# Altium PCB zb_relay.PcbDoc
Units mil, origin at the board's own origin, x right, y up, seen from the top; angles counter-clockwise.
Board outline 3550 x 2400 mil, 2 copper layers (Top Layer, Bottom Layer); 57 components, 47 nets, 174 pads, 6 vias.
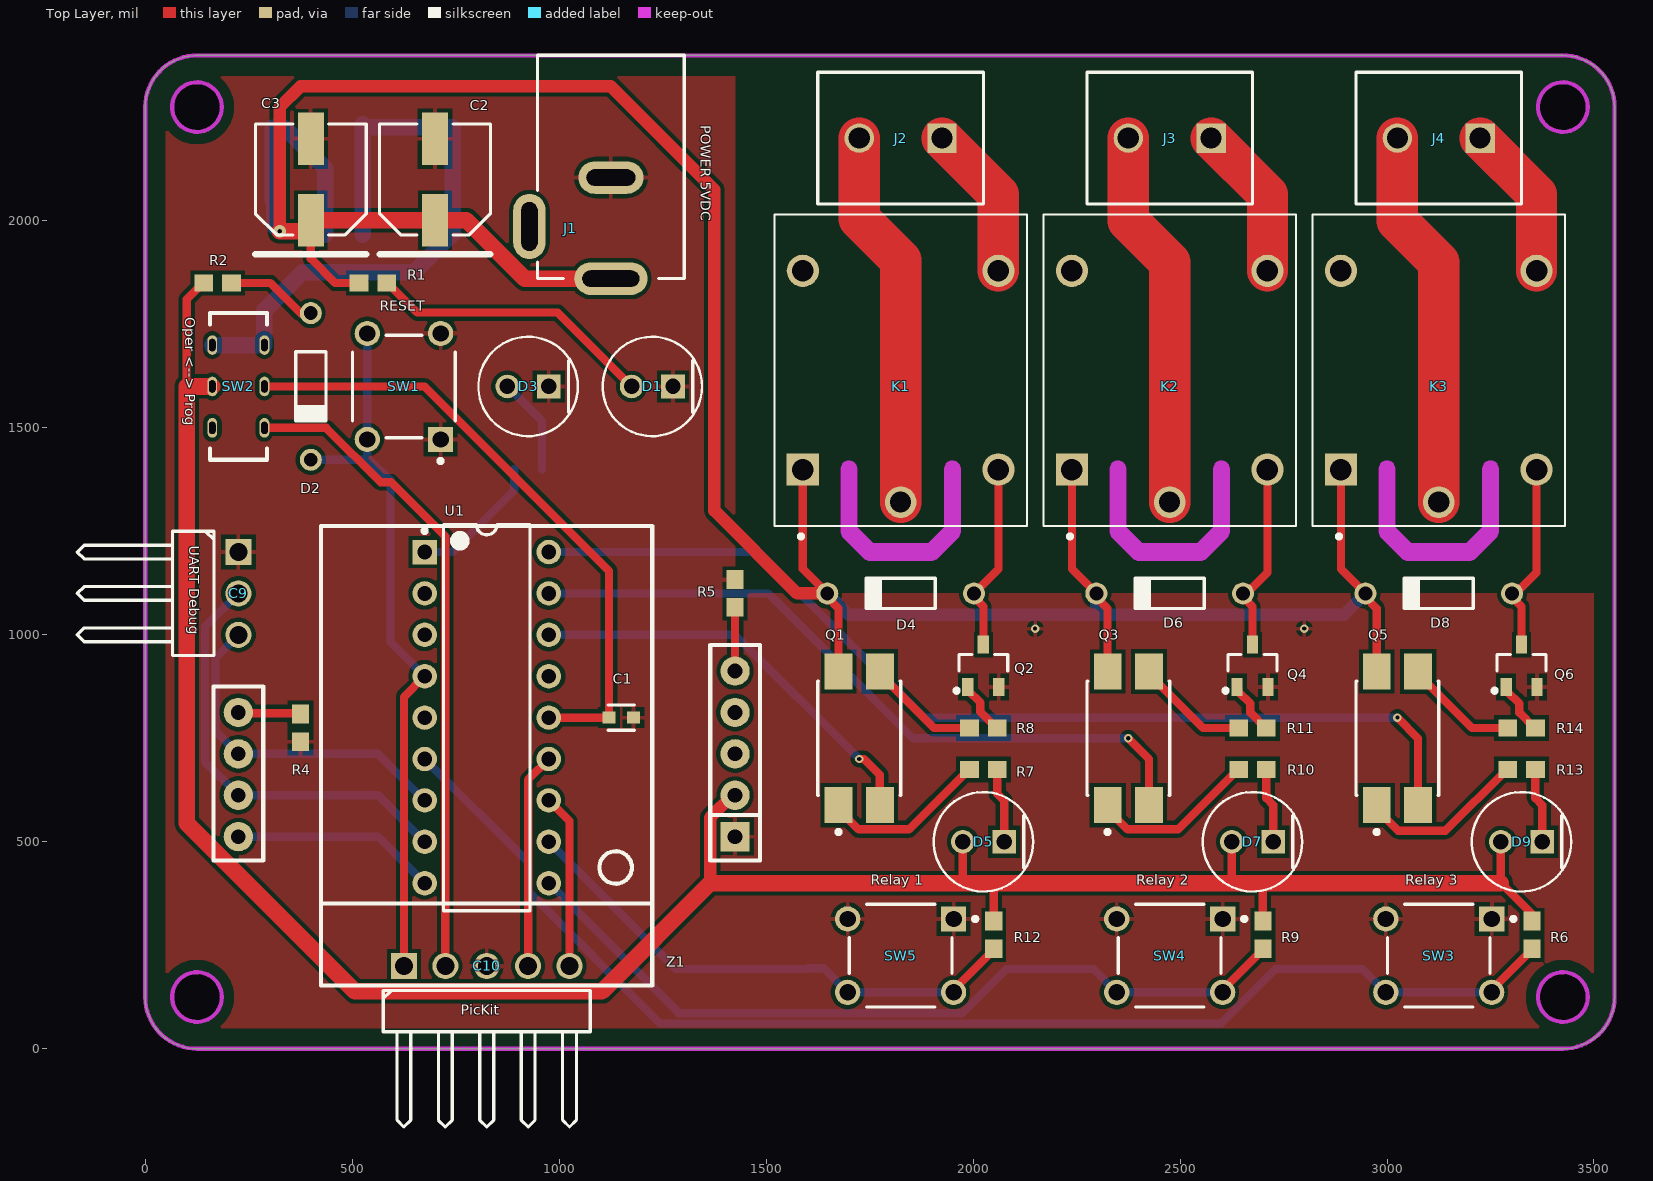
[diagram p0: Top Layer view]
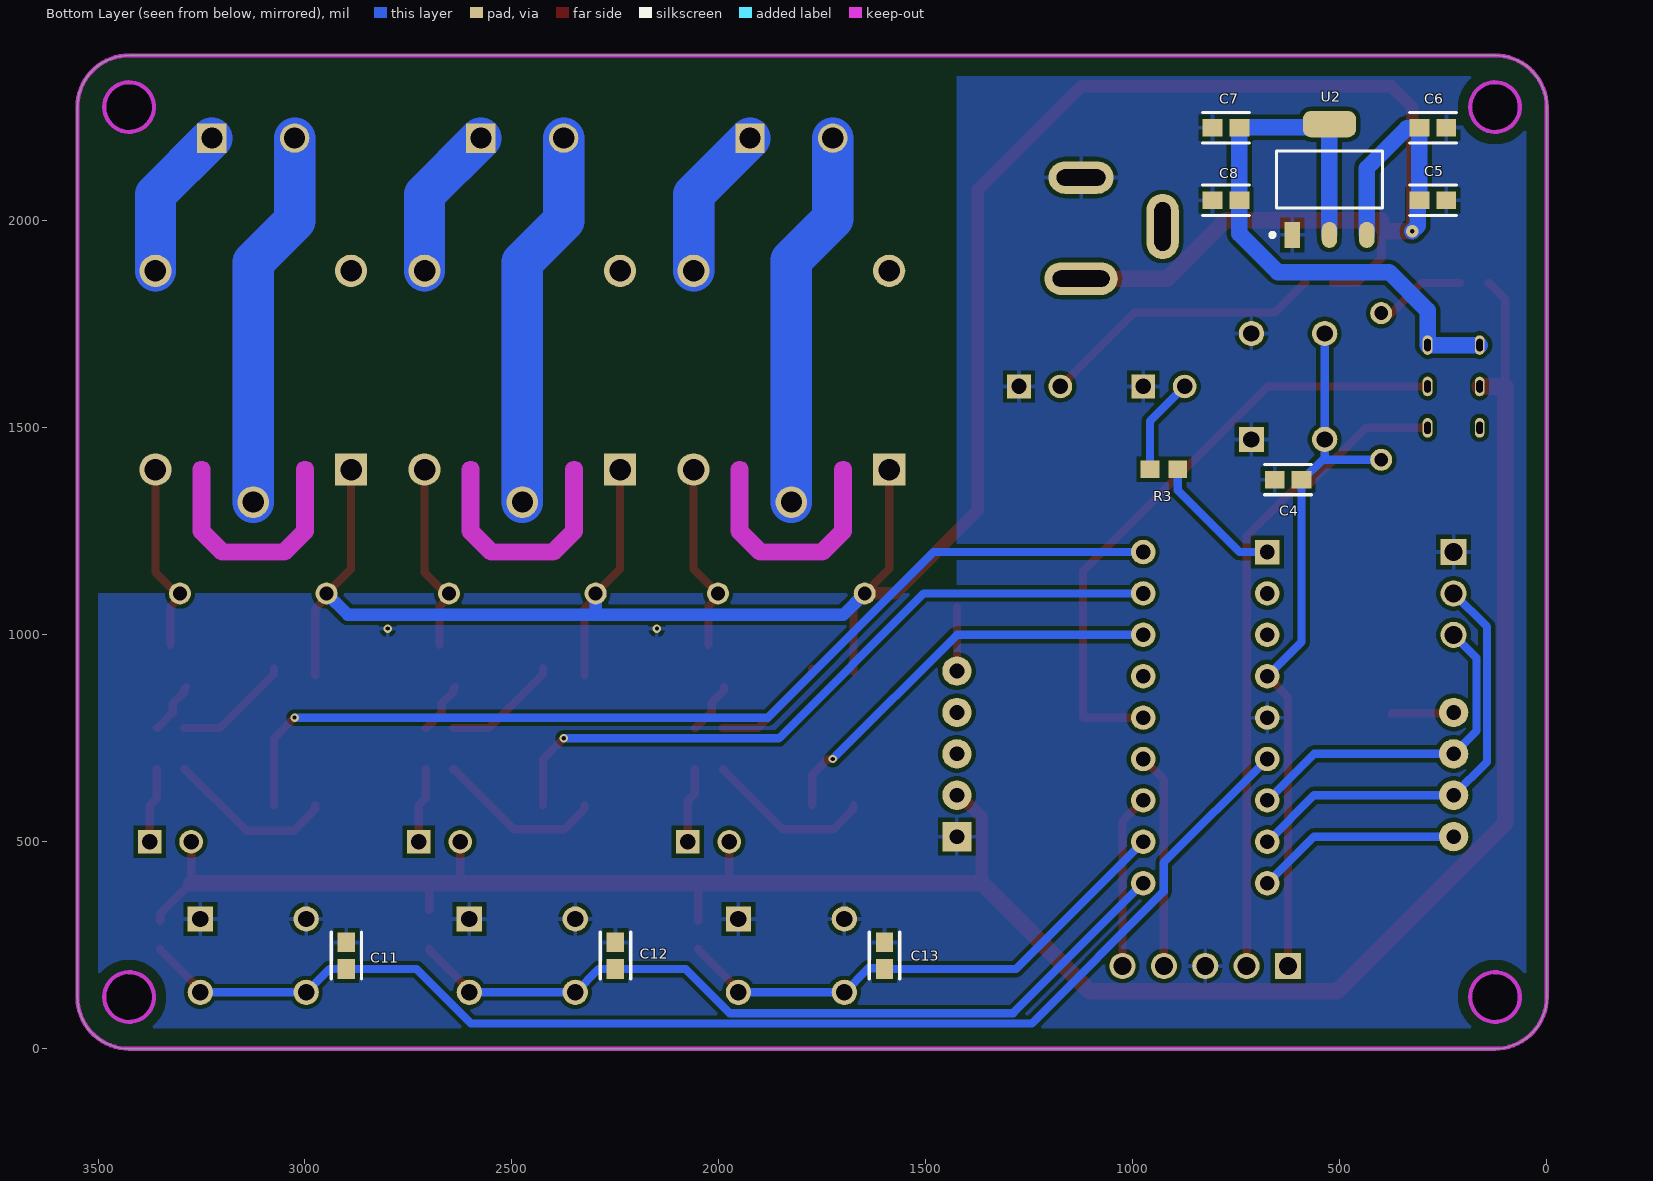
[diagram p1: Bottom Layer view, seen from below]
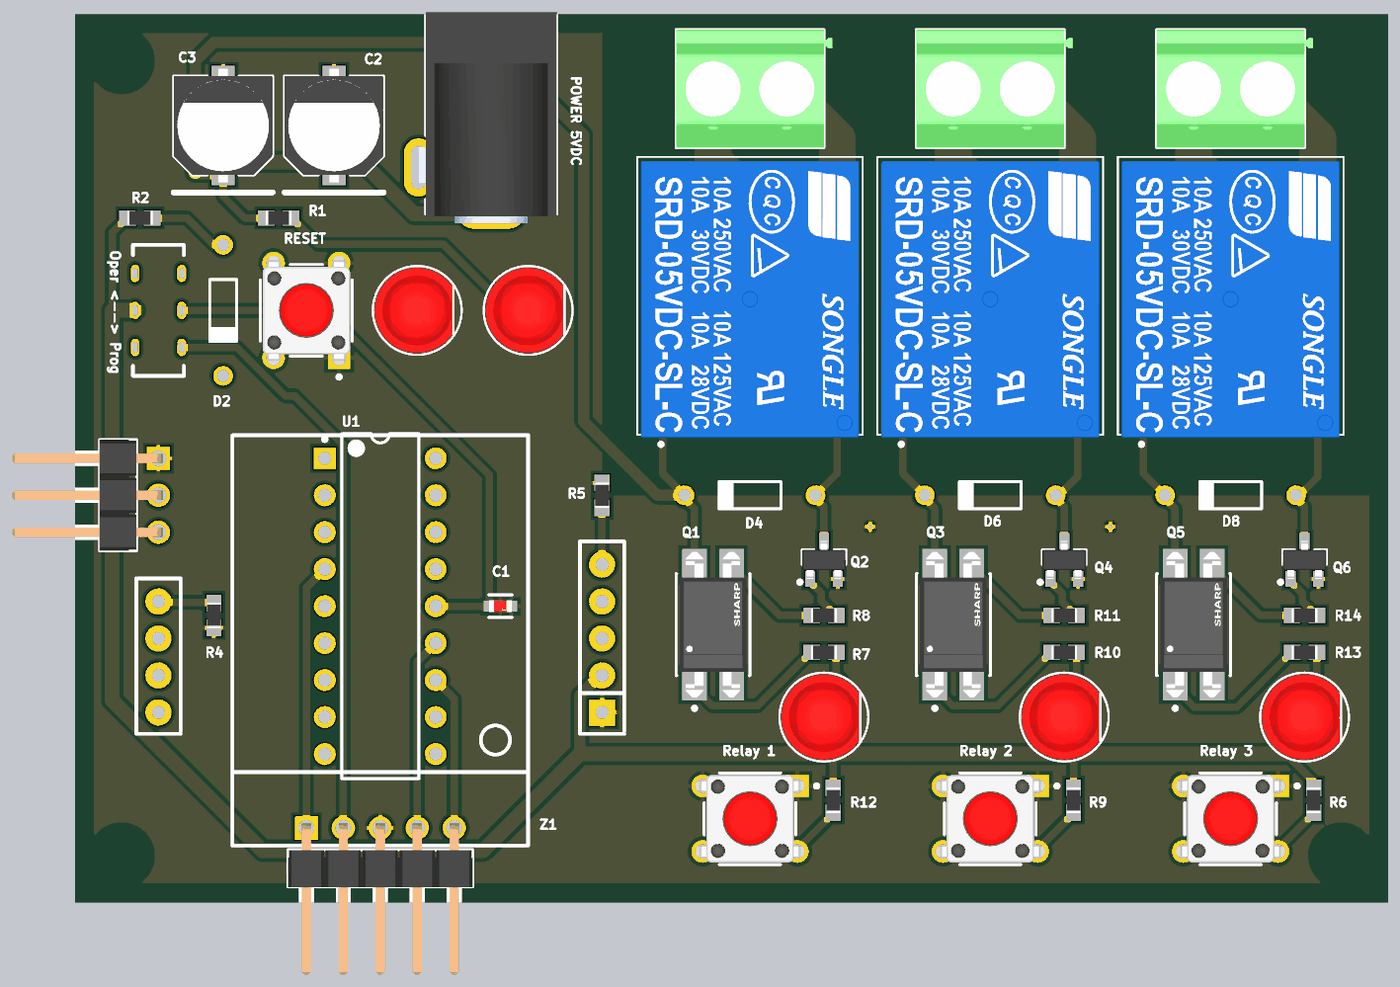
[diagram p2: 3D render of the assembled board from above, using the file's embedded part models]
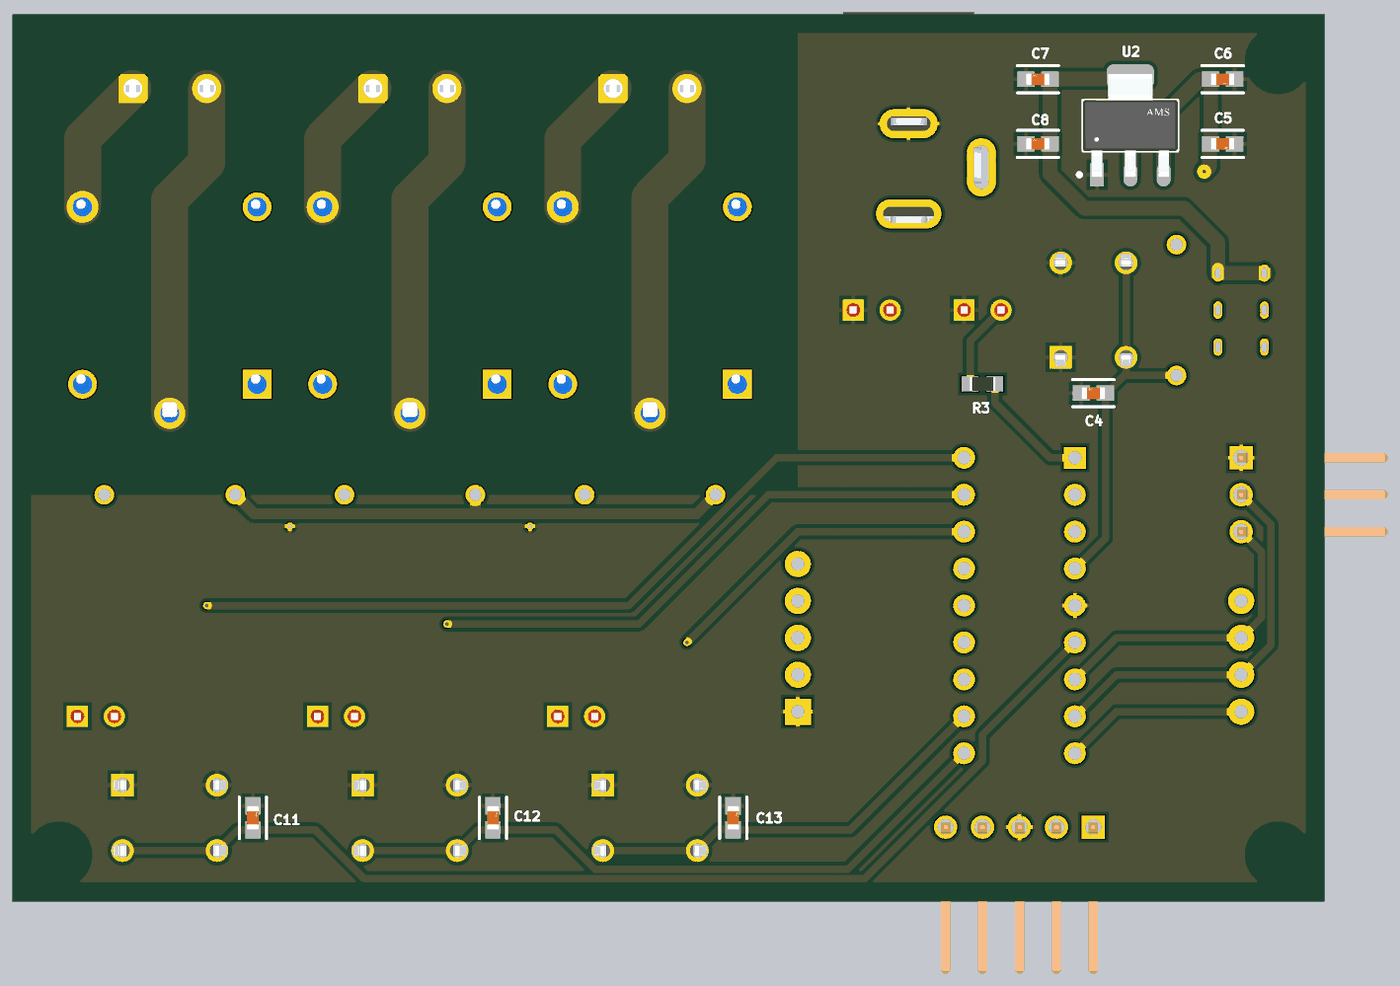
[diagram p3: 3D render of the assembled board from below, using the file's embedded part models]

## Layer stack, top to bottom
Top Solder: solder mask 0.4, Solder Resist, Dk 3.5
Top Layer: signal copper 1.4
Dielectric 1: dielectric 12.6, FR-4, Dk 4.8
Bottom Layer: signal copper 1.4
Bottom Solder: solder mask 0.4, Solder Resist, Dk 3.5

## Board outline
125,0 cw(c125,125) 0,125 0,2275 cw(c125,2275) 125,2400 3425,2400 cw(c3425,2275) 3550,2275 3550,125 cw(c3425,125) 3425,0
cut-out: 3035.81,1185.88 ccw(c3050,1200) 3050,1179.99 3200,1179.99 ccw(c3200,1200) 3214.19,1185.88 3214.15,1185.85 3264.15,1235.85 3264.12,1235.81 ccw(c3250,1250) 3270.02,1250 3270.02,1400 ccw(c3250,1400) 3229.98,1400 3229.98,1258.29 3191.71,1220.01 3058.29,1220.01 3020.02,1258.29 3020.02,1400 ccw(c3000,1400) 2979.98,1400 2979.98,1250 ccw(c3000,1250) 2985.88,1235.81 2985.85,1235.85
cut-out: 2385.81,1185.88 ccw(c2400,1200) 2400,1179.99 2550,1179.99 ccw(c2550,1200) 2564.19,1185.88 2564.15,1185.85 2614.15,1235.85 2614.12,1235.81 ccw(c2600,1250) 2620.01,1250 2620.01,1400 ccw(c2600,1400) 2579.99,1400 2579.99,1258.29 2541.71,1220.01 2408.29,1220.01 2370.01,1258.29 2370.01,1400 ccw(c2350,1400) 2329.99,1400 2329.99,1250 ccw(c2350,1250) 2335.88,1235.81 2335.85,1235.85
cut-out: 1735.81,1185.88 ccw(c1750,1200) 1750,1179.99 1900,1179.99 ccw(c1900,1200) 1914.19,1185.88 1914.15,1185.85 1964.15,1235.85 1964.12,1235.81 ccw(c1950,1250) 1970.01,1250 1970.01,1400 ccw(c1950,1400) 1929.99,1400 1929.99,1258.29 1891.71,1220.01 1758.29,1220.01 1720.01,1258.29 1720.01,1400 ccw(c1700,1400) 1679.99,1400 1679.99,1250 ccw(c1700,1250) 1685.88,1235.81 1685.85,1235.85
cut-out: 125,65 cw(c125,125) 65,125 cw(c125,125) 125,185 cw(c125,125) 185,125 cw(c125,125)
cut-out: 3365,2275 ccw(c3425,2275) 3425,2215 ccw(c3425,2275) 3485,2275 ccw(c3425,2275) 3425,2335 ccw(c3425,2275)
cut-out: 3365,125 ccw(c3425,125) 3425,65 ccw(c3425,125) 3485,125 ccw(c3425,125) 3425,185 ccw(c3425,125)
cut-out: 125,2215 cw(c125,2275) 65,2275 cw(c125,2275) 125,2335 cw(c125,2275) 185,2275 cw(c125,2275)

## Design rules (kind name [scope] priority, off if disabled: settings)
Clearance [All] p1: gap=5 ignorepadtopadclearanceinfootprint=TRUE except(10: Track-THPad Track-Poly SMDPad-Poly THPad-Poly Via-Poly; 30: Poly-Region)
ComponentClearance [All] p1: gap=0 collisioncheckmode=3 verticalgap=0 showdistances=FALSE
HoleSize [All] p1: absolutevalues=TRUE maxlimit=150 minlimit=1 maxpercent=80.000 minpercent=20.000
MinimumSolderMaskSliver [All] p1: minsoldermaskwidth=1
PolygonConnect [All] p1: connectstyle=Relief reliefconductorwidth=10 reliefentries=4 polygonreliefangle="90 Angle" airgapwidth=10
RoutingVias [All] p1: holewidth=10 width=20 viastyle="Through Hole" minholewidth=5 minwidth=10 maxholewidth=20 maxwidth=50
SilkToSilkClearance [All] p1: silktosilkclearance=5
SilkToSolderMaskClearance [IsPad] p1: minsilkscreentomaskgap=1 clearancetoexposedcopper=TRUE
SolderMaskExpansion [All] p1: expansion=4 istentingtop=FALSE
Width [All] p1: maxlimit=100 minlimit=10 preferedwidth=20
25 further rules are at their usual default settings.

## Classes and differential pairs
component class zb_16f628a: C1 C2 C3 C4 C5 C6 C7 C8 C9 C10 D1 D2 D3 J1 R1 R2 R3 R4 R5 SW1 SW2 U1 U2 Z1
component class relay_button: C11 C12 C13 D4 D5 D6 D7 D8 D9 J2 J3 J4 K1 K2 K3 Q1 Q2 Q3 Q4 Q5 Q6 R6 R7 R8 R9 R10 R11 R12 R13 R14 SW3 SW4 SW5

## Components (designator, comment, footprint, x,y, rotation, side; value= is the part's Value field where it differs from the comment)
C1 "0.1uF" FP-0603-L_1_6_0_15-W_0_81-MFG 1150,800 r0 top
C2 "100uF" PNSC-FK-V-D8_V 700,2100 r90 top
C3 "100uF" PNSC-FK-V-D8_V 400,2100 r90 top
C4 "10μF" FP-0603-L_1_6_0_15-W_0_81-IPC_A 625,1375 r0 bottom
C5 "100nF" FP-0603-L_1_6_0_15-W_0_81-IPC_A 275,2050 r180 bottom
C6 "10μF" FP-0603-L_1_6_0_15-W_0_81-IPC_A 275,2225 r180 bottom
C7 "10μF" FP-0603-L_1_6_0_15-W_0_81-IPC_A 775,2225 r0 bottom
C8 "100nF" FP-0603-L_1_6_0_15-W_0_81-IPC_A 775,2050 r0 bottom
C9 "UART Debug" JP3-D1C 125,950 r270 top
C10 "PicKit" JP5-D1C 1075,100 r0 top
C11 "10μF" FP-0603-L_1_6_0_15-W_0_81-IPC_A 2900,225 r90 bottom
C12 "10μF" FP-0603-L_1_6_0_15-W_0_81-IPC_A 2250,225 r90 bottom
C13 "10μF" FP-0603-L_1_6_0_15-W_0_81-IPC_A 1600,225 r90 bottom
D1 "Power" FP-HLMP-4700-MFG 1225,1600 r180 top
D2 "1N4148" NXP-SOD27-2_V 400,1600 r270 top
D3 "Indicator" FP-HLMP-4700-MFG 925,1600 r180 top
D4 "1N4148" NXP-SOD27-2_V 1825,1100 r180 top
D5 "Relay 1" FP-HLMP-4700-MFG 2025,500 r180 top
D6 "1N4148" NXP-SOD27-2_V 2475,1100 r180 top
D7 "Relay 2" FP-HLMP-4700-MFG 2675,500 r180 top
D8 "1N4148" NXP-SOD27-2_V 3125,1100 r180 top
D9 "Relay 3" FP-HLMP-4700-MFG 3325,500 r180 top
J1 "POWER 5VDC" KYCN-KLDX-0202-B_V 1125,2400 r270 top
J2 "Relay1" PHOE-1729128-2_V 1825,2200 r180 top
J3 "Relay2" PHOE-1729128-2_V 2475,2200 r180 top
J4 "Relay3" PHOE-1729128-2_V 3125,2200 r180 top
K1 "SRD-05VDC-SL-C" RELAY_SRD-05VDC-SL-C 1825,1600 r270 top
K2 "SRD-05VDC-SL-C" RELAY_SRD-05VDC-SL-C 2475,1600 r270 top
K3 "SRD-05VDC-SL-C" RELAY_SRD-05VDC-SL-C 3125,1600 r270 top
Q1 "PC817XNNIP0F" FP-PC817XNNIP0F-MFG 1725,750 r90 top
Q2 "2SC1815" SOT23_3 2025,925 r90 top
Q3 "PC817XNNIP0F" FP-PC817XNNIP0F-MFG 2375,750 r90 top
Q4 "2SC1815" SOT23_3 2675,925 r90 top
Q5 "PC817XNNIP0F" FP-PC817XNNIP0F-MFG 3025,750 r90 top
Q6 "2SC1815" SOT23_3 3325,925 r90 top
R1 "1K" RESC1609X55X30ML15T15 550,1850 r180 top
R2 "10K" RESC1609X55X30ML15T15 175,1850 r180 top
R3 "510" RESC1609X55X30ML15T15 925,1400 r180 bottom
R4 "10K" RESC1609X55X30ML15T15 375,775 r90 top
R5 "10K" RESC1609X55X30ML15T15 1425,1100 r270 top
R6 "10K" RESC1609X55X30ML15T15 3350,275 r90 top
R7 "1K" RESC1609X55X30ML15T15 2025,675 r180 top
R8 "1K" RESC1609X55X30ML15T15 2025,775 r0 top
R9 "10K" RESC1609X55X30ML15T15 2700,275 r90 top
R10 "1K" RESC1609X55X30ML15T15 2675,675 r180 top
R11 "1K" RESC1609X55X30ML15T15 2675,775 r0 top
R12 "10K" RESC1609X55X30ML15T15 2050,275 r90 top
R13 "1K" RESC1609X55X30ML15T15 3325,675 r180 top
R14 "1K" RESC1609X55X30ML15T15 3325,775 r0 top
SW1 "RESET" FP-EVQ-PAG05R-MFG 625,1600 r180 top
SW2 "MH-G6" MH-G6 225,1600 r270 top
SW3 "RESET" FP-EVQ-PAG05R-MFG 3125,225 r270 top
SW4 "RESET" FP-EVQ-PAG05R-MFG 2475,225 r270 top
SW5 "RESET" FP-EVQ-PAG05R-MFG 1825,225 r270 top
U1 "PIC16F628A-I/P" PDIP300-P18 825,800 r0 top
U2 "AMS1117-3.3" FP-AMS1117-IPC_A 525,2100 r90 bottom
Z1 "SZ1V5" "SZ1V5 PINOUT MODULE" 825,825 r180 top

## Footprints (in the part's own frame and the unit in brackets; to place one, negate y for a bottom-side part, rotate by r counter-clockwise, add the part's x,y. Pads: shape width x height; smd on the part's side, far side on the other; paste and mask are expansions set on the pad)
FP-0603-L_1_6_0_15-W_0_81-IPC_A [mil]
  rect 47.5x42.06 smd paste+0 mask+0: 1(-32.51,0) 2(32.51,0)
  silkscreen extent -56,-37 56,37, body extent -31,-16 31,16, height 35
FP-0603-L_1_6_0_15-W_0_81-MFG [mm]
  rect 0.8x0.75 smd paste+0 mask+0: 1(-0.75,0) 2(0.75,0)
  silkscreen extent -0.8,-0.77 0.8,0.77, body extent -1.25,-0.58 1.25,0.58, height 0.25
FP-AMS1117-IPC_A [mm]
  rect 1.604x0.952 smd paste+0 mask+0: 1(-3.395,2.29)
  rrect100% 1.604x0.952 smd paste+0 mask+0: 2(-3.395,0) 3(-3.395,-2.29)
  rrect59% 1.604x3.262 smd paste+0 mask+0: 4(3.395,0)
  silkscreen extent -3.52,-3.25 1.75,3.63, body extent -3.53,-3.25 3.53,3.25, height 1.8
FP-EVQ-PAG05R-MFG [mm]
  rect 1.55x1.55 hole 1 paste-1000 mask+0: A(-2.25,3.25)
  round 1.55 hole 1 paste-1000 mask+0: A'(-2.25,-3.25) B(2.25,3.25) B'(2.25,-3.25)
  silkscreen extent -3.15,-3.15 3.15,4.7, body extent -3.25,-4.13 3.25,4.13, height 0.25
FP-HLMP-4700-MFG [mm]
  rect 1.45x1.45 hole 0.95 paste-1000 mask+0: 1(-1.27,0)
  round 1.45 hole 0.95 paste-1000 mask+0: 2(1.27,0)
  silkscreen extent -3.05,-3.05 3.05,3.05, body extent -3.15,-3.15 3.15,3.15, height 0.25
FP-PC817XNNIP0F-MFG [mm]
  rect 2.2x1.7 smd paste+0 mask+0: 1(-4.1,1.27) 2(-4.1,-1.27) 3(4.1,-1.27) 4(4.1,1.27)
  silkscreen extent -5.87,-2.54 3.5,2.54, body extent -5.3,-2.64 5.3,2.64, height 0.25
JP3-D1C [mm] "3 pins, 1 row, right angled, gold plating"
  rect 1.6x1.6 hole 1.1: 1(-6.35,2.54)
  round 1.6 hole 1.1: 2(-3.81,2.54) 3(-1.27,2.54)
  silkscreen extent -7.62,-7.34 0,1.04, body extent -7.62,-7.52 0,2.84, height 2.55
JP5-D1C [mm] "5 pins, 1 row, right angled, gold plating"
  rect 1.6x1.6 hole 1.1: 1(-11.43,2.54)
  round 1.6 hole 1.1: 2(-8.89,2.54) 3(-6.35,2.54) 4(-3.81,2.54) 5(-1.27,2.54)
  silkscreen extent -12.7,-7.34 0,1.04, body extent -12.7,-7.52 0,2.84, height 2.55
KYCN-KLDX-0202-B_V [mm] "3 Conductor Jack, 9 x 14.5 mm Body"
  oval 2x4.5 hole 1 slot 3.5 at 90 deg: 1(13.7,0)
  oval 2x4 hole 1 slot 3 at 90 deg: 2(7.5,0)
  oval 4x2 hole 1 slot 3 at 0 deg: 3(10.5,-5)
  silkscreen extent 0,-4.5 13.7,4.5, body extent -0.15,-5 14.35,4.5, height 11
MH-G6 [mm]
  rrect100% 1.2x0.6 hole 0.4 slot 0.75 at 0 deg: 1(-2.54,-1.6) 2(0,-1.6) 3(2.54,-1.6) 4(-2.54,1.6) 5(0,1.6) 6(2.54,1.6)
  silkscreen extent -4.5,-1.75 4.5,1.75
NXP-SOD27-2_V [mm] "SOD27, 2-Leads, Dia 1.85mm, Body Length 4.25mm, Pin Spacing 9mm"
  round 1.35 hole 0.85: 1(-4.5,0) 2(4.5,0)
  silkscreen extent -2.12,-0.93 2.12,0.92, body extent -4.78,-0.92 4.78,0.92, height 1.84
PDIP300-P18 [mm] "DIP, 18-Pin, Row Spacing 7.62 mm, Pitch 2.54 mm"
  rect 1.5x1.5 hole 0.9: 1(-3.81,10.16)
  round 1.5 hole 0.9: 2(-3.81,7.62) 3(-3.81,5.08) 4(-3.81,2.54) 5(-3.81,0) 6(-3.81,-2.54) 7(-3.81,-5.08) 8(-3.81,-7.62) 9(-3.81,-10.16) 10(3.81,-10.16) 11(3.81,-7.62) 12(3.81,-5.08) 13(3.81,-2.54) 14(3.81,0) 15(3.81,2.54) 16(3.81,5.08) 17(3.81,7.62) 18(3.81,10.16)
  silkscreen extent -3.93,-11.85 2.65,11.85, body extent -3.6,-11.8 3.6,11.8, height 5.33
PHOE-1729128-2_V [mm] "Receptacle, 2-Leads, Body 8.1x10.16mm, Pitch 5.08mm"
  rect 1.8x1.8 hole 1.3: 1(-2.54,0)
  round 1.8 hole 1.3: 2(2.54,0)
  silkscreen extent -5.08,-4.05 5.08,4.05, body extent -5.65,-4.05 5.08,4.05, height 10.01
PNSC-FK-V-D8_V [mm] "CAPAE, 2-Leads, Body 6.80x6.80mm"
  rect 3.2x1.6 smd: 1(-2.5,0) 2(2.5,0)
  silkscreen extent -4.6,-3.4 3.4,3.4, body extent -3.9,-3.4 3.9,3.4, height 8
RELAY_SRD-05VDC-SL-C [mm]
  rect 1.98x1.98 hole 1.32: A1(5.1,-6)
  round 1.98 hole 1.32: A2(5.1,6) NC(-7.1,-6) NO(-7.1,6)
  round 1.935 hole 1.29: COM(7.1,0)
  silkscreen extent -10.55,-7.75 9.3,7.75, body extent -10.27,-7.5 8.73,7.5, height 16.15
RESC1609X55X30ML15T15 [mm] "Chip Resistor, 2-Leads, Body 1.75x0.95mm, IPC Low Density"
  rect 1.15x1.05 smd: 1(-0.85,0) 2(0.85,0)
  body extent -0.87,-0.48 0.87,0.48, height 0.55
SOT23_3 [mm] "SOT23, 3-Leads, Body 2,90x2,30mm, Pitch 0,95mm, IPC Medium Density"
  rect 1.1x0.7 smd: 1(-1.3,0.95) 2(-1.3,-0.95) 3(1.3,0)
  silkscreen extent -1.65,-1.5 0.7,1.78, body extent -1.3,-1.5 1.3,1.5, height 1.1
"SZ1V5 PINOUT MODULE" [mm]
  rect 1.8x1.8 hole 0.9: 1(-15.24,7.937)
  round 1.8 hole 0.9: 3(-15.24,5.397) 5(-15.24,2.857) 6(-15.24,0.317) 7(-15.24,-2.223) 13(15.24,7.938) 16(15.24,5.398) 17(15.24,2.858) 24(15.24,0.318)
  silkscreen extent -16.76,-11.11 16.76,17.08

## Part data
C1 C4 C6 C7 C11 C12 C13: library part CMP-1035-02592-4, "General Purpose Ceramic Capacitor, 0603, 100nF, 10%, X7R, 15%, 50V", Capacitance=100nF, Case Code (Imperial)=0603, Case Code (Metric)=1608, Dielectric=X7R, Dielectric Material=Ceramic, Max Operating Temperature=125°C, Min Operating Temperature=-55°C, Package Quantity=1, Tolerance=10%, Voltage=50V, Case/Package=0603, Contact Plating=Tin, Depth=0.81mm, Dissipation Factor=2.5%, Height=0.9mm, Lead Free="Lead Free", Length=1.6mm, Mount="Surface Mount", Number of Pins=2, Packaging="Tape and Reel", Radiation Hardening=No, REACH SVHC="No SVHC", Termination=SMD/SMT, Thickness=0.035inch, Voltage Rating=50V, Voltage Rating (DC)=50V, Width=0.81mm
C2 C3: library part CMP-2000-06206-1, "Aluminum Electrolytic Capacitor, 100 uF, +/- 20%, 25 V, 2-Pin SMD (Size Code D8), -55 to 105 degC, RoHS, Tape and Reel", Capacitance=100µF, Case Size/Dimension=Ø6.3x7.7mm, Lifetime@Temperature=2000Hrs@105°C, Manufacturer=Panasonic, Operating Temp Range=-55to+105°C, Operating Temp-Max=105°C, Package Description="2-Pin Electrolytic Aluminum Capacitor, Body 6.6 x 6.6 mm", Package Reference=FK-V-D8, Rated Voltage=25V, Ripple Current=280mA, Datasheet URL=http://industrial.panasonic.com/cdbs/www-data/pdf/RDE0000/ABA0000C1181.pdf, Datasheet Version=03/2016, Impedance=0.34O, Manufacturer URL=http://www.panasonic.com/, Mounting Technology=SurfaceMount, Package URL=http://industrial.panasonic.com/cdbs/www-data/pdf/RDE0000/DME0000COL48.pdf, Series=FK, Type=Can
C5 C8: library part CMP-1035-02592-4, "General Purpose Ceramic Capacitor, 0603, 100nF, 10%, X7R, 15%, 50V", Case Code (Imperial)=0603, Case Code (Metric)=1608, Dielectric=X7R, Dielectric Material=Ceramic, Max Operating Temperature=125°C, Min Operating Temperature=-55°C, Package Quantity=1, Tolerance=10%, Voltage=50V, Capacitance=100nF, Case/Package=0603, Contact Plating=Tin, Depth=0.81mm, Dissipation Factor=2.5%, Height=0.9mm, Lead Free="Lead Free", Length=1.6mm, Mount="Surface Mount", Number of Pins=2, Packaging="Tape and Reel", Radiation Hardening=No, REACH SVHC="No SVHC", Termination=SMD/SMT, Thickness=0.035inch, Voltage Rating=50V, Voltage Rating (DC)=50V, Width=0.81mm
C9: library part JP3, "WR-PHD 2.54 mm Angled Socket Header", Manufacturer="W¨¹rth Elektronik eiSos GmbH", partNo=613003143121, ComponentLink1 Description=Manufacturer, ComponentLink1URL=http://www.we-online.com, ComponentLink2 Description=Datasheet, ComponentLink2URL=http://katalog.we-online.de/em/datasheet/6130xx143121.pdf, Created by="Karrer Zheng", Created Date="29 March 2013", NoPins=03
C10: library part JP5, "WR-PHD 2.54 mm Angled Socket Header", Manufacturer="W¨¹rth Elektronik eiSos GmbH", partNo=613005143121, ComponentLink1 Description=Manufacturer, ComponentLink1URL=http://www.we-online.com, ComponentLink2 Description=Datasheet, ComponentLink2URL=http://katalog.we-online.de/em/datasheet/6130xx143121.pdf, Created by="Karrer Zheng", Created Date="29 March 2013", NoPins=05
D1 D3 D5 D7 D9: library part CMP-18399-000008-1, "LED RED DIFFUSED T-1 3/4 T/H", Colour=Red, Forward Current=2mA, Forward Voltage=1.7V, Manufacturer=Broadcom, Manufacturer Part Number=HLMP-4700, Power Dissipation=14mW, Reverse Voltage=5V, Temperature="-40°C to +100°C", Temperature Range High=+100°C, Temperature Range Low=-40°C, Automotive=No, Category=Diode, ComponentLink2Description=Datasheet, ComponentLink2URL=https://docs.broadcom.com/docs/AV02-1557EN, Device Class L1=Optoelectronics, Device Class L2=LEDs, Device Class L3=unset, Digikey Description="LED RED DIFFUSED T-1 3/4 T/H", Lead Free=Yes, Led Orientation=Straight, Luminous Intensity=2.3mcd, Mouser Description="LED; Red; 2.3mcd; 0.24In.Dia.; T-1-3/4; 500mA; 1.7V; 635nm; 50deg; 5V; 24mW; -55degC;", Octopart=https://octopart.com/hlmp-4700-broadcom-71130526, Package=HLMP-4700, Peak Emmision Wavelength=635nm, RoHS=TRUE, Viewing Angle=50°, Wavelength=626nm
D2 D4 D6 D8: library part CMP-0648-00002-1, "High-speed Diode, 100 V, 450 mA, 2-Pin SOD27, RoHS", Manufacturer="NXP Semiconductors", Cd="4 pF Max.", ComponentLink1Description="Manufacturer URL", ComponentLink1URL=http://www.nxp.com/, ComponentLink2Description=Datasheet, ComponentLink2URL=http://www.nxp.com/documents/data_sheet/1N4148_1N4448.pdf, ComponentLink3Description="Package Specification", ComponentLink3URL=http://www.nxp.com/documents/data_sheet/1N4148_1N4448.pdf, Configuration=Single, DatasheetVersion=Aug-04, IF="200 mA Max.", IFRM="450 mA", IFSM="4 A Max.", IR (VR="20 V)=25 nA", Mounting Technology="Through Hole", PackageDescription="2-Pin Hermetically Sealed Glass Package, Axial Leaded, Dia 1.85 mm, Body Length 4.25 mm, Lead Spread 25.4 mm", PackageReference=SOD27, PackageVersion=Aug-04, PartNumber=1N4148, RoHS=TRUE, Trr="4 ns Max.", VF (IF="10 mA)=1 V", VR="100 V Max."
J1: library part CMP-0256-00001-1, "3 Conductor Power Jack, 2 break 2 aux contacts", PartNumber=KLDX-0202-B, ComponentLink1Description="Manufacturer URL", ComponentLink1URL=http://kycon.com/, ComponentLink2Description=Datasheet, ComponentLink2URL=http://anacapa.kycon.com/Catalog_PDF/KLDX_0202.pdf, Contact Finish=Brass, Mounting Technology="Through Hole", PackageDescription="Jack, 9 x 14.5 mm Body, 2.5 mm Center Pin Diameter", PackageReference=KLDX-0202-B
J2 J3 J4: library part CMP-2000-05815-1, "PCB Terminal Block, 13.5 A, 400 V, 2-Pin THD, RoHS, Bulk", Current Rating=13500mA, Manufacturer="Phoenix Contact", Package Description="2-Pin Through Hole Device, Body 8.1 x 10.16 mm, Pitch 5.08 mm", Package Reference=1729128-2, Package Version=03/2015, PartNumber=1729128, Voltage Rating=400V, Datasheet URL=https://datasheet.ciiva.com/16046/1729128-16046181.pdf, Datasheet Version=12/2013, Manufacturer URL=http://www.phoenixcontact.com/, Mounting Technology=ThroughHole, No. of Positions=2, No. of Rows=1, Orientation=Horizontal, Package URL=https://www.phoenixcontact.com/online/portal/pi/pxc/product_detail_page/!ut/p/b1/3VdJjqNKFDxLH8AFycySyWY2ozFsEPOMMQaDOX1XedGL_1Vdm5YXJleknhSKeBkvI6EA8ncAo3AYoDhBQGco6KN7VURTdemj9us_IEKEZo_YHiPAEWEFmDGOHMORkqKYCORBZxgL7ZoaZYcbFFUZ3fqxSY6GOuxydWUuHqz1ynmMFygu583Bob0Ewr6Sd_l-5m-kAueHiB0jpRwZwe58wwtkpxtMYd_LmGcDRU02dRNEyWt6Y2ti5pSyJ_reIkzIulrqApdnbT11V5jnCKbYNCvhEM1MCpPByat_X379-iThf08CI5GfOPqfBeS3BRoBOdD55AKVv0iLwCMq-2BrzXWSGRH7pUGD9uwXQjiph3xL0DKQwdGa0JImiIOmBNOestqgwTHSSs2oOep-78apyXQBvNi8ZLaFjvjWvcaUEBu0MC6Wbe-d6mB0FAebo2lUWinqYaZs5DAYzV0RP9yitUjnGJ0iI9xhZkT42OCQNUJJhkgWINNQLP2JFP6OpMg3JCVg70jqHT0lvKOnhHf0lPuOnnLf0VPuWx6_dxwUIvwk5WMkT0kLL1mh61l2yZVSzG3pYV_bqo-mj6uMKwKwdnnW8Jh5RTOJzMOA5c-eJDaZQw4mTMPH02PvS_ZAqNVjVTo2WyYLkwH_KU1mmmG5kjRhDqPXLwwVHvVOjCM60-fpXvTDfMGW1PVFVS1r4e4yVDk4ZdNbkUHvqPqQSeian4UD39fNKmachqdJ1NJbyk8rXT9mXTvPk3oE5meulKGgiruPJek-4I9hTT6G8ZLOyRSm2RRVbThERQad5OS28hdt4YW4vG0stgYYzsWsK4_7y6DZMjJSCqri1kyiZR5vD7pwIrNR7QwPHTcLTI5qT7eRlpHrdGiupYlqQDJ7zy_CND8fWWBoLRXxk1RVcXiBQwbTD4Xi7KL-FuO94t9xaqweXzH, Packing=Bulk, Pitch=5.08mm, RoHS=TRUE
K1 K2 K3: "5V Trigger Relay Module For Arduino And Raspberry Pi 5V Trigger Relay Module For Arduino And Raspberry Pi", Package=None, Availability=Unavailable, MF="{'manufacturer': u'Songle Relay'}", MP=SRD-05VDC-SL-C, Price=None
Q1 Q3 Q5: library part CMP-65434-000005-1, "OPTOISOLATOR 5KV TRANS 4SMD", Case/Package=SMD/SMT, Collector Emitter Saturation Voltage=200mV, Collector Emitter Voltage (VCEO)=80V, Forward Current=50mA, Forward Voltage=1.4V, Isolation Voltage=5kV, Max Operating Temperature=100°C, Max Power Dissipation=200mW, Min Operating Temperature=-30°C, Output Current per Channel=30mA, Package Quantity=2000, Reverse Breakdown Voltage=6V, Collector-emitter Voltage-Max=200mV, Contact Plating=Copper, Fall Time=18000ns, Input Current=50mA, Input Type=DC, Isolation Voltage-Max=5kV, Lead Free="Lead Free", Max Collector Current=50mA, Max Input Current=50mA, Max Output Voltage=80V, Mount="Surface Mount", Number of Channels=1, Number of Elements=1, Number of Pins=4, Output Voltage=80V, Packaging="Tape and Reel", Power Dissipation=200mW, Radiation Hardening=No, Rise Time=18000ns, RoHS Compliant=Yes
Q2 Q4 Q6: "TRANS NPN 50V 0.15A SOT23-3", MPN=2SC1815, Solder=SMT
R1 R2 R3 R4 R5 R6 R7 R8 R9 R10 R11 R12 R13 R14: library part CMP-1012-00623-3, "Chip Resistor, 10 KOhm, +/- 1%, 0.1 W, -55 to 155 degC, 0603 (1608 Metric), RoHS, Tape and Reel", Case Code (Imperial)=0603, Case Code (Metric)=1608, Manufacturer=Panasonic, Max Operating Temperature=155degC, Max Power Dissipation=100mW, Min Operating Temperature=-55degC, Package Description="2-Pin Surface Mount Device, Body 1.6 x 0.85 mm", Package Quantity=1, Package Reference=603, Resistance=10KOhm, Temperature Coefficient=100ppm\/degreesC, Tolerance=1%, Voltage Rating=75V, Case\/Package=0603, Composition=ThickFilm, Contact Plating=Tin, Datasheet URL=https://industrial.panasonic.com/cdbs/www-data/pdf/RDA0000/AOA0000C304.pdf, Datasheet Version=02/2017, Depth=0.8mm, Height=0.45mm, Lead Free=LeadFree, Length=1.6mm, Manufacturer URL=http://www.panasonic.com/, Military Standard=Not, Mount=SurfaceMount, Mounting Technology=SurfaceMount, Number of Pins=2, Number of Terminations=2, Packaging=TapeandReel, Power Rating=100mW, Radiation Hardening=No, REACH SVHC=NoSVHC, RoHSCompliant=true, Termination=SMD/SMT, Voltage Rating (DC)=75V, Width=0.031inch
SW1 SW3 SW4 SW5: library part CMP-05618-000039-1, "SWITCH TACTILE SPST-NO 0.02A 15V", Actuator Color=Red, Contact Current Rating=20mA, Contact Resistance=50mR, Max Operating Temperature=70°C, Max Voltage Rating (DC)=15V, Min Operating Temperature=-20°C, Operating Force=2.6N, Package Quantity=500, Actuator Length=1.6mm, Actuator Type=Standard, Contact Plating=Silver, Current Rating=20mA, Depth=6.5mm, Electrical Life=50000Cycles, Height=5mm, Illumination Type=Non-Illuminated, Lead Free="Lead Free", Length=6mm, Max Current Rating=20mA, Mechanical Life=50000Cycles, Mount="Through Hole", Orientation=Straight, Packaging=Bulk, Radiation Hardening=No, REACH SVHC="No SVHC", RoHS Compliant=Yes, Series=EVQPA, Size=6mm, Switch Function=Off-Mom, Switch Travel=0.25mm, Termination="PC Pin", Throw Configuration=SPST, Voltage Rating (DC)=15V, Width=6mm
SW2: "6-pin switch MH-G6 2.54mm"
U1: library part CMP-0115-00122-1, "FLASH-Based 8-Bit CMOS Microcontroller with nanoWatt Technology, 2K (x14-Bit words) FLASH, 224 Bytes SRAM, 18-Pin PDIP, 3.0 to 5.5V Supply Range, Industrial Temperature", Code_JEDEC=MS-001, DatasheetVersion="revF, Mar-2007", PackageDescription="18-Lead Plastic Dual In-Line (P) - 300 mil Body [PDIP]", PackageReference=PDIP300-P18, PackageVersion="revBB, Aug-2009"
U2: library part CMP-209535-000001-1, "LDO Voltage Regulators 1A, 3.3V", Dropout Voltage=1.1V, Manufacturer="Advanced Monolithic Systems", Max Junction Temp=+125°C, Max Power Dissipation=1.2W, Max Supply Voltage=15V, Nominal Supply Current=5mA, Output Current=1A, Output Voltage=3.3V, Package=AMS1117, Temperature="-40°C to +125°C", Temperature Range Low=-40°C, Automotive=No, Category=IC, ComponentLink2Description=Datasheet, ComponentLink2URL=http://www.advanced-monolithic.com/pdf/ds1117.pdf, Device Class L1="Integrated Circuits (ICs)", Device Class L2="Power Management ICs", Device Class L3="Voltage Regulators - Linear", Height=1.8mm, Ipc Land Pattern Name=SOT229P700X180-4, Lead Free=Yes, Manufacturer Part Number=AMS1117-3.3, Number Of Outputs=1, Octopart=https://octopart.com/ams1117-3.3-advanced+monolithic+systems-25899300, Output Type=Fixed, RoHS=TRUE, Standoff Height=0.64mm, Temperature Range High=+125°C
Z1: library part SZ1V5_Alt

## Via types
v1: diameter 20, hole 10, Top Layer to Bottom Layer, 5 vias
v2: diameter 30, hole 10, Top Layer to Bottom Layer, 1 vias

## Nets (pads, with @x,y where several pads share a name; then routed paths per layer and width w, separated by ;. In a path a pad name is that pad's centre, name@x,y a point inside that pad or via, vN(x,y) a via of type N, cw(c..) or ccw(c..) an arc to the next point about the centre after c; other vN are vias at no path point)
+3: C7.1 C8.1 SW2.1 SW2.4 U2.2 U2.4 | length 1485.3
  Bottom Layer w40: SW2.1 SW2.4 287.99,1783.62 380.67,1876.3 649.81,1876.3 742.49,1968.97 C7.1 741.46,2226.03 532.63,2226.03 U2.4 U2.2
+5: C2.1 C3.1 C5.1 C6.1 D4.2 D6.2 D8.2 J1.1 K1.A1 K2.A1 K3.A1 Q1.4 Q3.4 Q5.4 R1.2 U2.3 | length 7248.3
  Top Layer w20: C3.1@400,1975 400,1908.58 458.58,1850 R1.2 ; K1.A1 1588.78,1159.05 D4.2 1647.83,1091.03 1675,1063.86 Q1.4 ; K2.A1 2238.78,1159.05 D6.2 2297.83,1091.03 2325,1063.86 Q3.4@2325,918.5 ; Q3.4@2325,901.57 Q3.4 ; K3.A1 2888.78,1159.05 D8.2 2947.83,1091.03 2975,1063.86 Q5.4@2975,918.5 ; Q5.4@2975,901.57 Q5.4
  Top Layer w30: v2(325,1975) 325,2275 375,2325 1125,2325 1375,2075 1375,1300 1575,1100 D4.2
  Top Layer w40: v2(325,1975) 388.5,1975 400,1986.5 C3.1 775.71,2001.57 916.66,1860.63 J1.1
  Bottom Layer w30: D4.2 1699.41,1048.43 2297.83,1048.43 ; D6.2 2297.83,1048.43 ; D8.2 2896.26,1048.43 2297.83,1048.43
  Bottom Layer w40: v2(325,1975) 311.26,1988.74 311.26,2048.97 310.24,2050 C5.1 C6.1 308.54,2223.97 338.22,2223.97 434.84,2127.35 U2.3
BUTTON1: C11.1 R6.1 SW3.B SW3.B' U1.6 | length 3106.7
  Top Layer w20: SW3.B 3252.95,142.52 3350,239.57 R6.1
  Bottom Layer w20: U1.6 925.47,449.53 925.47,379.48 1244.05,60.91 2598.88,60.91 2730.46,192.49 2940.98,192.49 SW3.B' SW3.B
BUTTON2: C12.1 R9.1 SW4.B SW4.B' U1.10 | length 1970.7
  Top Layer w20: SW4.B 2602.95,142.52 2700,239.57 R9.1
  Bottom Layer w20: U1.10 1289.09,85.91 1973.88,85.91 2080.46,192.49 2290.98,192.49 SW4.B' SW4.B
BUTTON3: C13.1 R12.1 SW5.B SW5.B' U1.11 | length 1276
  Top Layer w20: SW5.B 1952.95,142.52 2050,239.57 R12.1
  Bottom Layer w20: U1.11 1282.51,192.49 1597.49,192.49 1600,195 1600.85,194.15 1639.31,194.15 SW5.B' SW5.B
CFG0: R4.2 Z1.24 | length 151.7
  Top Layer w20: Z1.24 227.02,810.48 372.98,810.48 R4.2
CFG1: R5.2 Z1.7 | length 154
  Top Layer w20: Z1.7 R5.2
GND: C1.2 C2.2 C3.2 C4.2 C5.2 C6.2 C7.2 C8.2 C9.1 C10.3 C11.2 C12.2 C13.2 D1.1 D3.1 J1.2 Q2.2 Q4.2 Q6.2 R4.1 R5.1 SW1.A SW1.A' SW3.A SW3.A' SW4.A SW4.A' SW5.A SW5.A' U1.5 U2.1 Z1.1
  other v1: 2150,1015 2800,1015
LED_IND: R3.2 U1.1 | length 329.1
  Bottom Layer w20: U1.1 742.2,1200 891.54,1349.33 R3.2
MCLR/VPP: C4.1 C10.1 D2.2 SW1.B SW1.B' U1.4 | length 1747.3
  Top Layer w20: C10.1 625,850 U1.4
  Bottom Layer w20: D2.2 541.93,1422.83 589.76,1375 C4.1 592.49,982.51 U1.4 ; 536.42,1422.83 SW1.B'
NetD1_2: D1.2 R1.1 | length 695.1
  Top Layer w20: R1.1 585.43,1850 656.97,1778.46 996.54,1778.46 D1.2
NetD2_1: D2.1 R2.1 | length 196.7
  Top Layer w20: R2.1 302.17,1850 D2.1@375,1777.17
NetD3_2: D3.2 R3.1 | length 234.6
  Bottom Layer w20: D3.2 958.46,1516.54 R3.1
NetD4_1: D4.1 K1.A2 Q2.3 | length 448
  Top Layer w20: D4.1@2002.17,1091.03 2025,1068.2 Q2.3 ; D4.1 2061.22,1159.06 K1.A2
NetD5_1: D5.1 R7.1 | length 181.8
  Top Layer w20: R7.1 2058.46,615.9 2075,599.36 D5.1
NetD6_1: D6.1 K2.A2 Q4.3 | length 457
  Top Layer w20: Q4.3 2675,1068.2 2652.17,1091.03 2711.22,1150.08 K2.A2
NetD7_1: D7.1 R10.1 | length 181.8
  Top Layer w20: R10.1 2708.46,605.27 2725,588.74 D7.1
NetD8_1: D8.1 K3.A2 Q6.3 | length 457
  Top Layer w20: Q6.3 3325,1068.2 3302.17,1091.03 3361.22,1150.08 K3.A2
NetD9_1: D9.1 R13.1 | length 181.8
  Top Layer w20: R13.1 3358.46,605.27 3375,588.74 D9.1
NetJ2_1: J2.1 K1.NO | length 753.8
  Top Layer w100: J2.1 2061.22,2063.78 K1.NO
  Bottom Layer w100: J2.1 2061.22,2063.78 K1.NO
NetJ2_2: J2.2 K1.COM | length 1841.9
  Top Layer w100: J2.2 1725,2005 1825,1905 K1.COM
  Bottom Layer w100: J2.2 1725,2005 1825,1905 K1.COM
NetJ3_1: J3.1 K2.NO | length 753.8
  Top Layer w100: J3.1 2711.22,2063.78 K2.NO
  Bottom Layer w100: J3.1 2711.22,2063.78 K2.NO
NetJ3_2: J3.2 K2.COM | length 1841.9
  Top Layer w100: J3.2 2375,2000 2475,1900 K2.COM
  Bottom Layer w100: J3.2 2375,2000 2475,1900 K2.COM
NetJ4_1: J4.1 K3.NO | length 753.8
  Top Layer w100: J4.1 3361.22,2063.78 K3.NO
  Bottom Layer w100: J4.1 3361.22,2063.78 K3.NO
NetJ4_2: J4.2 K3.COM | length 1841.9
  Top Layer w100: J4.2 3025,2000 3125,1900 K3.COM
  Bottom Layer w100: J4.2 3025,2000 3125,1900 K3.COM
NetQ1_1: Q1.1 R7.2 | length 406.4
  Top Layer w20: Q1.1 1675,578.74 1723.46,530.28 1844.84,530.28 1989.57,675 R7.2
NetQ1_3: Q1.3 R8.1 | length 283.7
  Top Layer w20: Q1.3@1775,918.5 1775,905.31 1905.31,775 R8.1
NetQ2_1: Q2.1 R8.2 | length 129.3
  Top Layer w20: Q2.1 1987.6,865.94 2017.54,836 2017.54,813.95 2056.5,775 R8.2
NetQ3_1: Q3.1 R10.2 | length 406.4
  Top Layer w20: Q3.1 2325,578.74 2373.46,530.28 2494.84,530.28 2639.57,675 R10.2
NetQ3_3: Q3.3 R11.1 | length 283.7
  Top Layer w20: Q3.3@2425,918.5 2425,905.31 2555.31,775 R11.1
NetQ4_1: Q4.1 R11.2 | length 129.3
  Top Layer w20: Q4.1 2641.38,870.04 2641.38,862.17 2669.66,833.88 2669.66,811.83 2706.5,775 R11.2
NetQ5_1: Q5.1 R13.2 | length 409.1
  Top Layer w20: Q5.1 2975,578.74 3026.75,526.99 3141.56,526.99 3289.57,675 R13.2
NetQ5_3: Q5.3 R14.1 | length 283.7
  Top Layer w20: Q5.3@3075,918.5 3075,905.31 3205.31,775 R14.1
NetQ6_1: Q6.1 R14.2 | length 129.3
  Top Layer w20: Q6.1 3291.38,870.04 3291.38,862.17 3319.66,833.88 3319.66,811.83 3356.5,775 R14.2
PGC: C10.5 U1.12 | length 420.7
  Top Layer w20: U1.12 1025,550 C10.5
PGD: C10.4 U1.13 | length 520.7
  Top Layer w20: C10.4 925,650 U1.13
PK_VDD: C10.2 SW2.6 | length 1583.1
  Top Layer w20: SW2.6 437.03,1500 568.12,1368.91 593.43,1368.91 725,1237.34 C10.2
RELAY1: Q1.2 U1.16 | length 1013.3
  Top Layer w20: v1(1725,700) 1736.72,700 1774.83,661.89 1774.83,588.76 Q1.2
  Bottom Layer w20: U1.16 1425,1000 v1(1725,700)
RELAY2: Q3.2 U1.17 | length 1727.1
  Top Layer w20: v1(2375,750) 2425,700 Q3.2
  Bottom Layer w20: U1.17 1505.28,1100 1855.28,750 v1(2375,750)
RELAY3: Q5.2 U1.18 | length 2447.8
  Top Layer w20: v1(3025,800) 3075,750 Q5.2
  Bottom Layer w20: U1.18 1481.97,1200 1881.97,800 v1(3025,800)
VCC: D5.2 D7.2 D9.2 R2.2 R6.2 R9.2 R12.2 SW2.2 Z1.3 | length 5661.4
  Top Layer w20: 100,1600 100,1810.43 139.57,1850 R2.2 ; 1975,400 D5.2 ; R12.2 2050,335.55 2050,400 ; 2625,400 D7.2 ; 2700,335.55 2700,400 ; D9.2 3275,400 3350,325 R6.2
  Top Layer w30: 1364.57,395.43 1364.57,400 1364.57,558.29 1418.78,612.5 Z1.3
  Top Layer w40: SW2.2 100,1600 100,544.96 506.46,138.5 1103.07,138.5 1364.57,400 1575,400 1975,400 2050,400 2225,400 2625,400 2700,400 2875,400 3275,400
VDD: C1.1 SW2.5 U1.14 | length 1517
  Top Layer w20: SW2.5 674.94,1600 1120.47,1154.47 C1.1 U1.14
Z_DC: Z1.5
Z_DD: Z1.6
Z_RST: U1.9 Z1.13 | length 496.6
  Bottom Layer w20: Z1.13 562.5,512.5 U1.9
Z_RX: C9.2 U1.8 Z1.16 | length 1050.7
  Bottom Layer w20: C9.2 144.57,1019.57 144.57,692.93 Z1.16 562.5,612.5 U1.8
Z_TX: C9.3 U1.7 Z1.17 | length 830
  Bottom Layer w20: C9.3 169.57,944.57 169.57,767.93 Z1.17 562.5,712.5 U1.7
pads on no net: J1.3 K1.NC K2.NC K3.NC SW2.3 U1.2 U1.3 U1.15

## Polygon pours and split planes (outlines as drawn)
GND on Bottom Layer "GND_L02_P000" (solid, pour order 0): 50,2350 1425,2350 1425,1100 3500,1100 3500,50 50,50
GND on Top Layer "GND_L01_P001" (solid, pour order 1): 50,2350 1425,2350 1425,1100 3500,1100 3500,50 50,50

## Keep-outs
Keep-Out Layer:
  circle w10: c125,125 r60
  circle w10: c3425,125 r60
  circle w10: c3425,2275 r60
  circle w10: c125,2275 r60
  lines w10: 0,2270 0,125 ccw(c125,125) 125,0 3425,0 ccw(c3425,125) 3550,125 3550,2275 ccw(c3425,2275) 3425,2400 130,2400 ; 0,2275 cw(c125,2275) 125,2400
  lines w40: 1700,1400 1700,1250 1750,1200 1900,1200 1950,1250 1950,1400 ; 2350,1400 2350,1250 2400,1200 2550,1200 2600,1250 2600,1400 ; 3000,1400 3000,1250 3050,1200 3200,1200 3250,1250 3250,1400

## Silkscreen, mask and mechanical layers (free items; w line width, h text height)
Top Overlay:
  text "Oper <--> Prog" at 96.33,1767 h25 r270